# Altium PCB cjb.PcbDoc (part 2 of 2)
Units mil, origin at the board's own origin, x right, y up, seen from the top; angles counter-clockwise.
Board outline 3395 x 2755 mil, 2 copper layers (Top Layer, Bottom Layer), stack 62.8 mil thick; 117 components, 75 nets, 401 pads, 144 vias.
Unrouted connection lines stored in the file: 2.
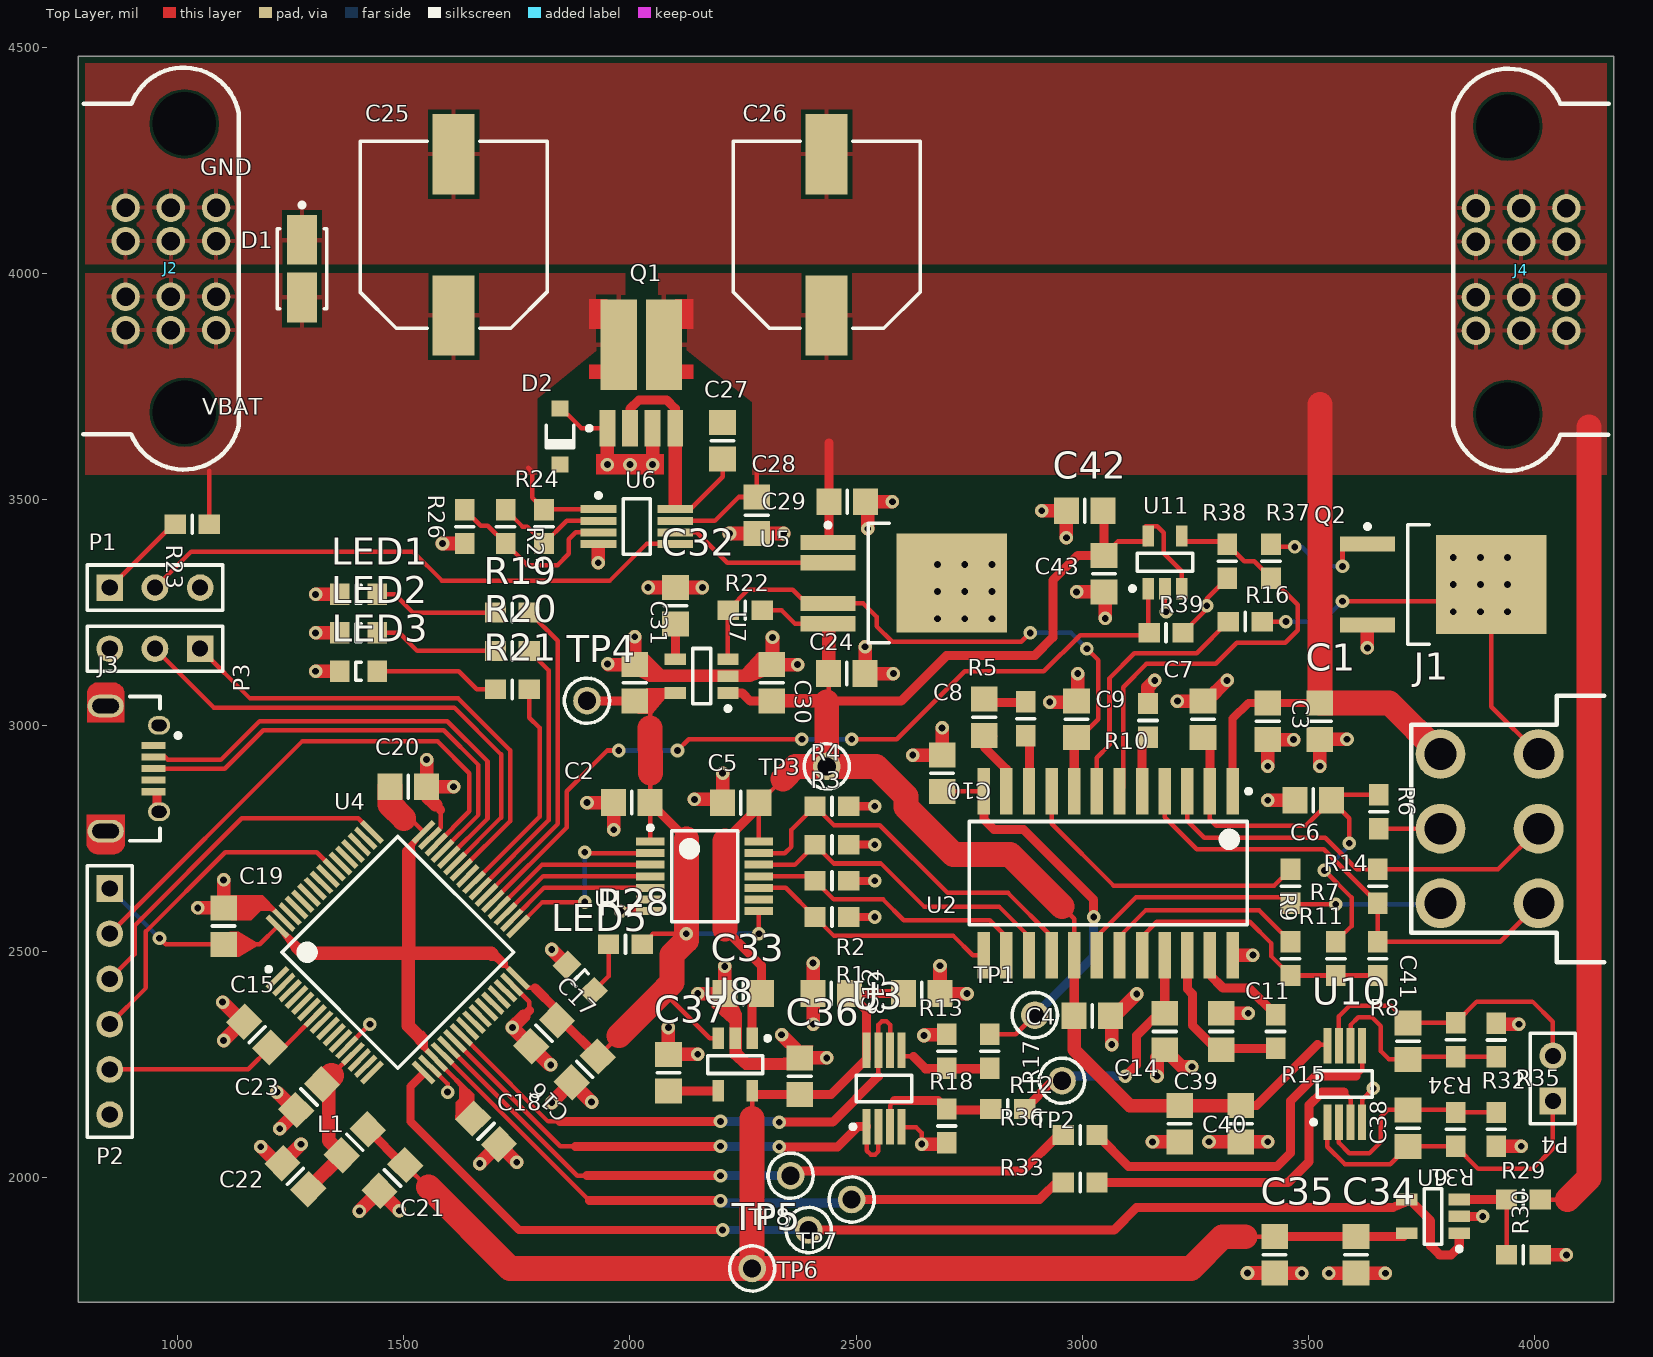
[diagram p0: Top Layer view]

## Via types
v1: diameter 30, hole 15, Top Layer to Bottom Layer, 144 vias

## Nets (pads, with @x,y where several pads share a name; then routed paths per layer and width w, separated by ;. In a path a pad name is that pad's centre, name@x,y a point inside that pad or via, vN(x,y) a via of type N, cw(c..) or ccw(c..) an arc to the next point about the centre after c; other vN are vias at no path point) (continued)
SWO: (continued)
  Top Layer w10: P2.4 930,2420 930,2545 1105,2720 1307.41,2720 U4.55
UA: C14.2 R17.1 TP2.1 U2.21 | length 551.3
  Top Layer w10: TP2.1@2935,2215 TP2.1
  Top Layer w20: R17.1 TP2.1@2935,2215 ; v1(3095,2225) 3120,2250 3120,2315 3169.15,2364.15 C14.2 U2.21
  Bottom Layer w20: TP2.1@2963.53,2225 v1(3095,2225)
UART_RX: P3.2 U4.43 | length 1145
  Top Layer w10: P3.2 1080,3040 1611.22,3040 1715,2936.22 1715,2796.81 U4.43
UART_TX: P3.1 U4.42 | length 1086.6
  Top Layer w10: P3.1 1160,3060 1620.14,3060 1735,2945.14 1735,2788.97 U4.42
UR: C10.2 R12.1 TP1.1 U2.12 | length 937.4
  Top Layer w10: C10.2@2678.33,2864.15 2687.58,2854.9 U2.12 ; R12.1 2852.4,2317.4 TP1.1 TP1.1@2870.33,2360
  Top Layer w20: U2.12 2782.06,2792.8 2804.86,2770 2870,2770 3025,2615 v1(3025,2576.86)
  Bottom Layer w20: TP1.1 3025,2490 v1(3025,2576.86)
USB_D_N: J3.2 U4.44 | length 1065.9
  Top Layer w10: J3.2@941.26,2930.59 J3.2 972.83,2930.59 978.62,2924.81 1095.86,2924.81 1181.05,3010 1596.22,3010 1685,2921.22 1685,2794.21 U4.44@1599.69,2708.89
USB_D_P: J3.3 U4.45 | length 1013.8
  Top Layer w10: J3.3@941.26,2905 J3.3 970.14,2905 970.34,2904.81 1104.14,2904.81 1189.34,2990 1587.94,2990 1665,2912.94 1665,2802.49 U4.45
VBAT: C25.1 D1.2 J2.7 J2.8 J2.9 J2.10 J2.11 J2.12 Q1.6 R23.2 R24.1 U6.1 | length 345.9
  Top Layer w10: R23.2 1070,3562.99 ; 1775,3570 1783.7,3561.3 1783.7,3503.7 R24.1 1810.98,3478.39 U6.1
VDDA: C22.2 C23.2 L1.2 U4.13 | length 379.1
  Top Layer w10: 1340,2226.94 U4.13
  Top Layer w30: C22.2 1288.99,1976.2 L1.2 1364.64,2051.86 1333.69,2082.81 1333.69,2192.77 C23.2
  Top Layer w55: C23.2 1320.53,2207.47 1340,2226.94
pads on no net: J2.25 J2.26 J3.1 J3.4 J4.25 J4.26 U1.6 U1.9 U4.1 U4.2 U4.3 U4.4 U4.5 U4.6 U4.8 U4.9 U4.10 U4.11 U4.14 U4.15 U4.16 U4.24 U4.25 U4.26 U4.27 U4.28 U4.29 U4.30 U4.41 U4.50 U4.51 U4.52 U4.53 U4.54 U4.56 U4.57 U4.58 U4.59 U4.60 U4.61 U4.62
copper on no net: | length 7.9
  Top Layer w10: 1327.5,2672.07 1332.21,2667.36 ; 1641.22,2667.36 1642.5,2667.36

## Polygon pours and split planes (outlines as drawn)
12V on Top Layer "Top Layer-12V" (solid, pour order 28): 4159.73,3999.71 4160.02,3555 2479.41,3555 2270,3555 2270,3715 2062,3878.83 2062,3999.71
VBAT on Top Layer "Top Layer-VBAT" (solid, pour order 26): 1990,3999.71 1990,3880.62 1795,3723.08 1795,3555 1572.02,3555 795,3555 795,3999.71
GND on Top Layer "Top Layer-GND" (solid, pour order 20): 4159.85,4464.74 4160.14,4020 794.71,4020 794.71,4465
no net on Top Layer "Top Layer-No Net" (solid, pour order 8): 805,4201.86
no net on Top Layer "Top Layer-No Net 1" (solid, pour order 6): 805,4461.86
VBAT on Bottom Layer "Bottom Layer-12V" (solid, pour order 42): 1925,3735 2024.97,3735 2025.03,3895 1925,3895
HEATER- on Bottom Layer "Bottom Layer-HEATER-" (solid, pour order 38): 3780,3420 3780,3200 3980,3200 3980,3420
12V on Bottom Layer "Bottom Layer-12V" (solid, pour order 36): 2030,3735 2124.94,3735 2125,3895 2030,3895
GND on Bottom Layer "Bottom Layer-GND" (solid, remove dead copper, pour order 4): 795,1740 4160,1740 4160,4465 795,4465

## Other copper
Top Layer:
  rectangle net NetC27_2: 1925,3555 2075,3600
  region net GND: 2351.9,2292.62 2404.79,2292.62 2380,2238.8 2323.8,2238.8 2252.82,2238.8 2220,2267.47 2220,2342.6 2181,2377.6 2185,2417.6 2236,2388.6 2247,2362.6 2247,2280.95 2262.95,2265 2328.4,2265 2360,2267.47
  region: 1541.72,2806.93
  region net 3V3D: 1115.72,2543.93 1134.72,2543.93 1173.72,2520.93 1174.72,2511.93 1135.72,2488.93 1119.72,2488.93
  region net 3V3D: 1606.42,2232.93 1655.22,2185.43 1655.22,2148.43 1635.22,2128.43 1614.17,2128.43 1615.22,2150.43 1615.22,2167.43 1622.72,2174.93 1622.72,2201.44 1606.72,2218.93
  region net GND: 1220.72,2591.93 1187.72,2624.93 1116.72,2624.93 1116.72,2571.42 1118.22,2569.92 1162.7,2569.92 1183.72,2590.93 1205.22,2590.93 1209.22,2586.93
  region: 1153.72,2567.93
  region net 3V3D: 1287.72,2511.93 1275.72,2514.93 1243.72,2541.93 1226.72,2541.93 1245.72,2514.93 1253.72,2500.93 1272.72,2481.93 1296.72,2481.93
  region net 3V3D: 1522.72,2707.93 1524.63,2711.76 1523.66,2733.25 1532.72,2745.93 1523.72,2752.93 1499.72,2728.93 1499.72,2704.93
  region net 3V3D: 1557.7,2281.93 1552.72,2288.93 1552.72,2314.93 1542.72,2324.93 1537.72,2319.93 1523.72,2319.93 1523.72,2300.93 1533.72,2288.93 1548.72,2275.93
  region net 5V: 2478.21,3044.86
  region net 3V3D: 2048.74,3026.09 2078.06,3060.09 2122.01,3060.09 2111.37,3083.09 2035.5,3083.09 2016.74,3026.09
  region net GND: 2005.26,3161.44 2035.5,3161.44 2073.5,3123.44 2248.5,3123.44 2283.5,3162.44 2323.5,3158.44 2294.5,3107.44 2268.5,3096.44 2041.5,3096.44 1988.5,3123.44
  region: 2723.65,2301.86
Bottom Layer:
  pour cut-out: 1915,3735 2135,3735 2135,3725 1915,3725
  pour cut-out: 1925,3905 1925,3725 1915,3725 1915,3905
  pour cut-out: 1915,3905 2135,3905 2135,3895 1915,3895
  pour cut-out: 3990,3190 3990,3430 3980,3430 3980,3190
  pour cut-out: 3780,3430 3980,3430 3980,3420 3780,3420
  pour cut-out: 3780,3190 3780,3430 3770,3430 3770,3190
  pour cut-out: 3770,3200 3980,3200 3980,3190 3770,3190
  pour cut-out: 2030,3735 2125,3735 2125,3725 2030,3725
  pour cut-out: 2030,3905 2125,3905 2125,3895 2030,3895
  pour cut-out: 2031,3905 2031,3725 2023,3725 2023,3905
  pour cut-out: 2135,3905 2135,3725 2125,3725 2125,3736.13 2125,3905
  pour cut-out: 2124.59,3904.59

## Silkscreen, mask and mechanical layers (free items; w line width, h text height)
Top Overlay:
  rectangle: 3490,821.86 4115,1151.86
  text "GND" at 4335,4221.93 h36
  text "GND" at 1050,4216.86 h36
  text "VBAT" at 1055,3686.93 h36
  text "12V" at 4350,3686.39 h36
  text "H+" at 4625,2951.86 h36
  text "H-" at 4625,2856.02 h36
  text "VS" at 4625,2754.96 h36
  text "IP" at 4625,2651.62 h36
  text "RC" at 4625,2549.26 h36
  text "VM" at 4625,2451.86 h36
  text "DAC1" at 4655,1941.86 h36 r90
  text "DAC2" at 4655,1741.86 h36 r90
  text "CJB-REV-A" at 3125,981.86 h36
  text "Kyle Bernier / Daeghan Elkin" at 4170,916.86 h36
Bottom Solder:
  rectangle: 1930,3740 2120,3890
  rectangle: 3780,3200 3980,3420
  rectangle: 2650,3205 2830,3384.65
Mechanical 1:
  the board outline again, w10